# Allegro board disceep.brd
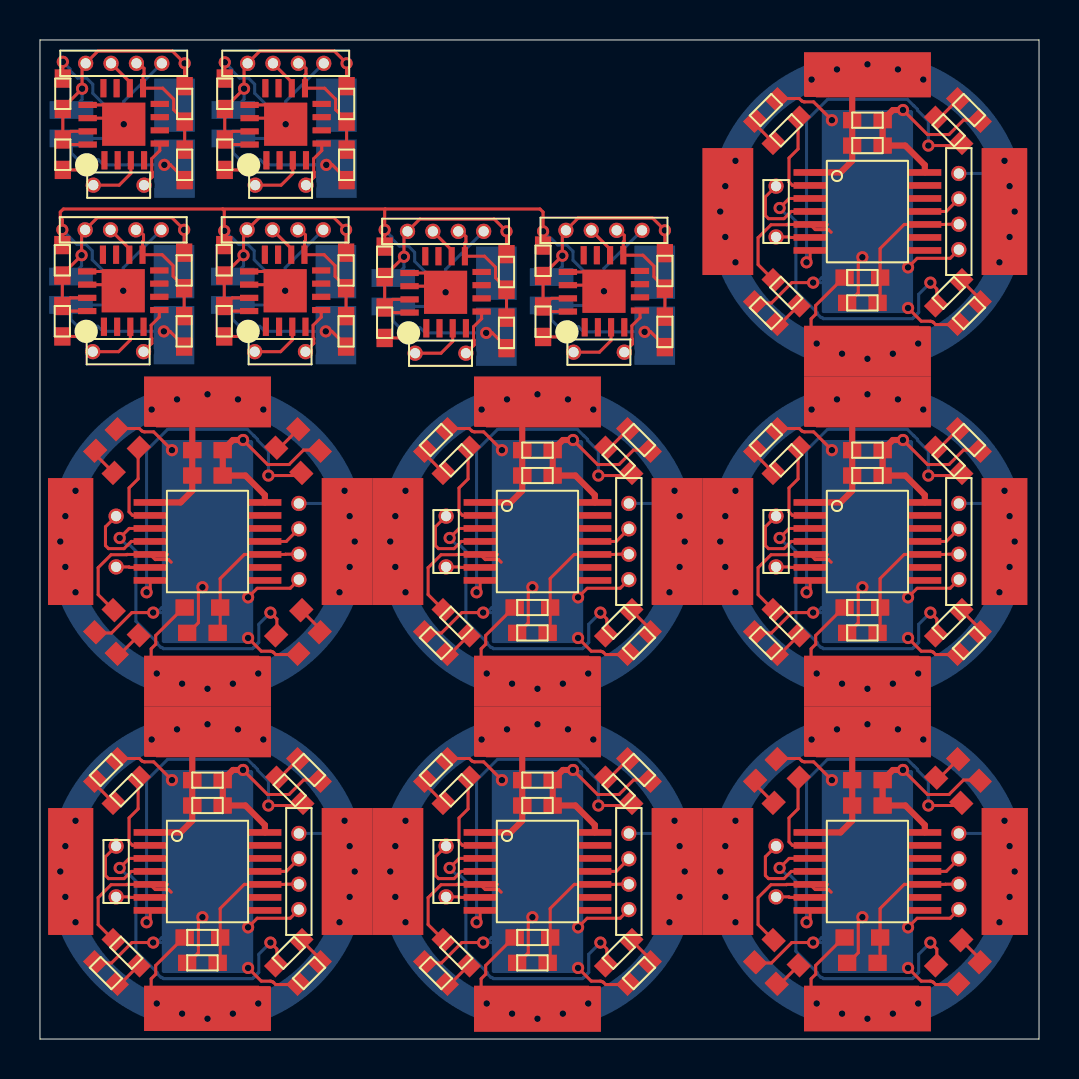
[diagram p0: board, top side]
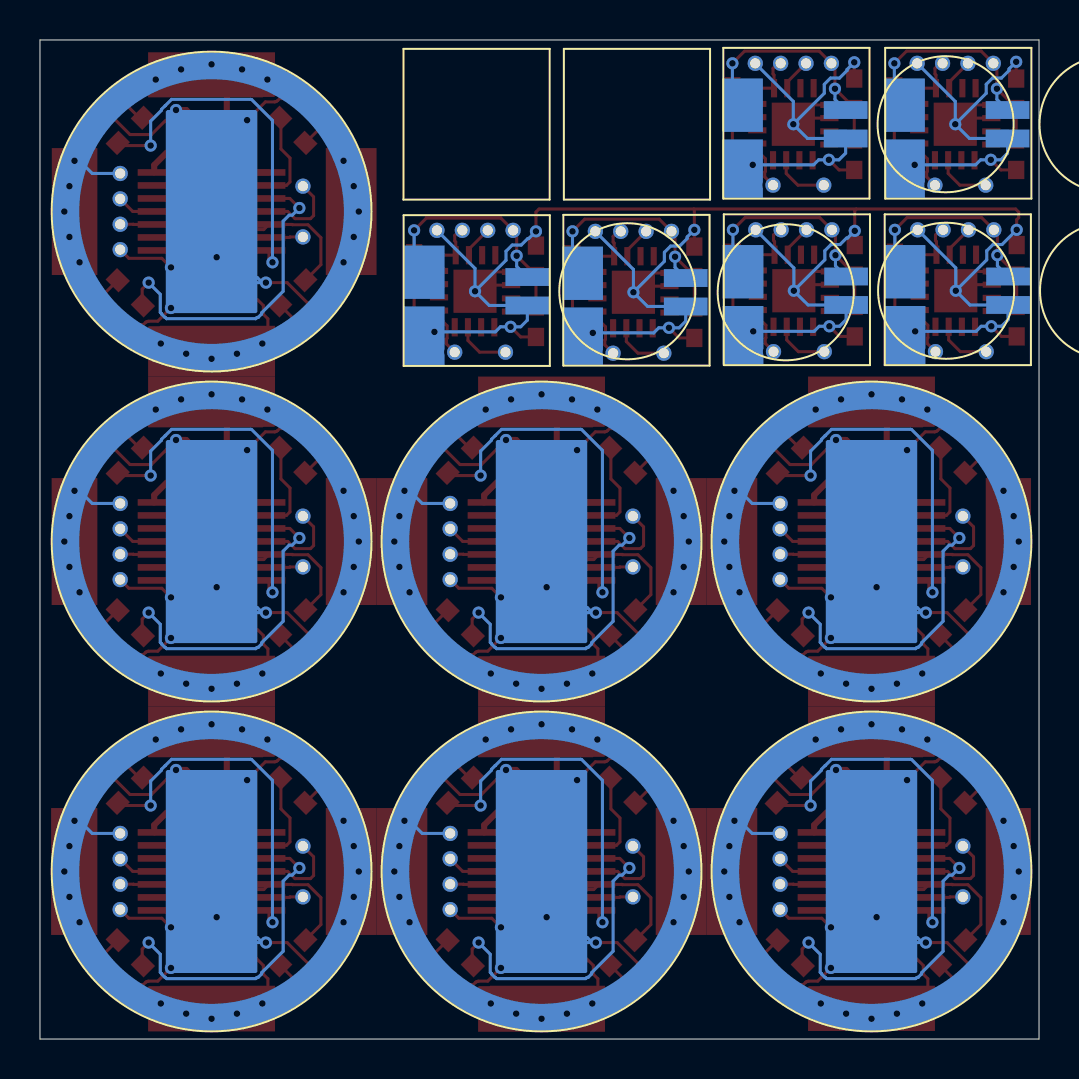
[diagram p1: board, bottom side, seen from below]

Outline 49.99 x 49.99 mm; copper layers: TOP, BOTTOM. Coordinates in mm from the lower left corner of the outline.
Outline path: 0,49.99 0,0 49.99,0 49.99,49.99 0,49.99

## Placement (name value [footprint] x y rotation side)
C1  10uF  [SMD_0603_CAP]  8.38 12.95 180 top
C2  .22uF  [SMD_0603_CAP]  8.38 11.68 180 top
C7  10uF  [SMD_0603_CAP]  1.12 38.96 270 top
C8  .22uF  [SMD_0603_CAP]  1.12 35.92 90 top
C10  100nf  [SMD_0603_CAP]  8.13 3.81 0 top
C11  10uF  [SMD_0603_CAP]  8.38 29.46 180 top
C12  .22uF  [SMD_0603_CAP]  41.4 11.68 180 top
C13  100nf  [SMD_0603_CAP]  8.13 20.32 0 top
C14  10uF  [SMD_0603_CAP]  24.89 12.95 180 top
C15  .22uF  [SMD_0603_CAP]  24.89 11.68 180 top
C16  100nf  [SMD_0603_CAP]  24.64 3.81 0 top
C17  100nf  [SMD_0603_CAP]  41.15 3.81 0 top
C18  10uF  [SMD_0603_CAP]  41.4 12.95 180 top
C19  .22uF  [SMD_0603_CAP]  8.38 28.19 180 top
C20  100nf  [SMD_0603_CAP]  7.21 35.41 90 top
C21  .25F  [SUPERCAP_VL3_2]  12.67 37.36 0 bottom
C22  100nf  [SMD_0603_CAP]  24.64 20.32 0 top
C23  10uF  [SMD_0603_CAP]  41.4 45.97 180 top
C24  .22uF  [SMD_0603_CAP]  41.4 44.7 180 top
C25  100nf  [SMD_0603_CAP]  41.15 20.32 0 top
C26  10uF  [SMD_0603_CAP]  24.89 29.46 180 top
C27  .22uF  [SMD_0603_CAP]  24.89 28.19 180 top
C28  100nf  [SMD_0603_CAP]  41.15 36.83 0 top
C29  10uF  [SMD_0603_CAP]  41.4 29.46 180 top
C30  .22uF  [SMD_0603_CAP]  41.4 28.19 180 top
C31  100nf  [SMD_0603_CAP]  15.34 43.74 90 top
C32  .25F  [SUPERCAP_VL3_2]  20.6 37.41 0 bottom
C33  10uF  [SMD_0603_CAP]  1.14 47.29 270 top
C34  .22uF  [SMD_0603_CAP]  9.25 44.25 90 top
C35  100nf  [SMD_0603_CAP]  7.24 43.74 90 top
C36  .25F  [SUPERCAP_VL3_2]  -3.43 45.77 0 bottom
C37  10uF  [SMD_0603_CAP]  17.25 38.89 270 top
C38  .22uF  [SMD_0603_CAP]  1.14 44.25 90 top
C39  100nf  [SMD_0603_CAP]  31.27 35.38 90 top
C40  .25F  [SUPERCAP_VL3_2]  4.67 45.77 0 bottom
C41  10uF  [SMD_0603_CAP]  25.17 38.94 270 top
C42  .22uF  [SMD_0603_CAP]  25.17 35.89 90 top
C43  100nf  [SMD_0603_CAP]  23.34 35.33 90 top
C44  .25F  [SUPERCAP_VL3_2]  -3.45 37.44 0 bottom
C45  10uF  [SMD_0603_CAP]  9.25 47.29 270 top
C46  .22uF  [SMD_0603_CAP]  17.25 35.84 90 top
C47  100nf  [SMD_0603_CAP]  15.32 35.41 90 top
C48  .25F  [SUPERCAP_VL3_2]  4.65 37.44 0 bottom
C49  10uF  [SMD_0603_CAP]  9.22 38.96 270 top
C50  .22uF  [SMD_0603_CAP]  9.22 35.92 90 top
D1  LED  [SMD_0603_LED]  3.3 13.46 225 top
D2  LED  [SMD_0603_LED]  13.46 3.3 45 top
D3  LED  [SMD_0603_LED]  3.3 3.3 315 top
D4  LED  [SMD_0603_LED]  13.46 13.46 135 top
D5  LED  [SMD_0603_LED]  3.3 29.97 225 top
D6  LED  [SMD_0603_LED]  13.46 19.81 45 top
D7  LED  [SMD_0603_LED]  3.3 19.81 315 top
D8  LED  [SMD_0603_LED]  13.46 29.97 135 top
D9  LED  [SMD_0603_LED]  19.81 13.46 225 top
D10  LED  [SMD_0603_LED]  29.97 3.3 45 top
D11  LED  [SMD_0603_LED]  19.81 3.3 315 top
D12  LED  [SMD_0603_LED]  29.97 13.46 135 top
D13  LED  [SMD_0603_LED]  36.32 13.46 225 top
D14  LED  [SMD_0603_LED]  46.48 3.3 45 top
D15  LED  [SMD_0603_LED]  36.32 3.3 315 top
D16  LED  [SMD_0603_LED]  46.48 13.46 135 top
D17  LED  [SMD_0603_LED]  36.32 46.48 225 top
D18  LED  [SMD_0603_LED]  46.48 36.32 45 top
D19  LED  [SMD_0603_LED]  36.32 36.32 315 top
D20  LED  [SMD_0603_LED]  46.48 46.48 135 top
D21  LED  [SMD_0603_LED]  19.81 29.97 225 top
D22  LED  [SMD_0603_LED]  29.97 19.81 45 top
D23  LED  [SMD_0603_LED]  19.81 19.81 315 top
D24  LED  [SMD_0603_LED]  29.97 29.97 135 top
D25  LED  [SMD_0603_LED]  36.32 29.97 225 top
D26  LED  [SMD_0603_LED]  46.48 19.81 45 top
D27  LED  [SMD_0603_LED]  36.32 19.81 315 top
D28  LED  [SMD_0603_LED]  46.48 29.97 135 top
J1  4 HEADER  [HEADER4_050]  12.95 8.38 180 top
J3  4 HEADER  [HEADER4_050]  4.17 40.49 270 top
J4  4 HEADER  [HEADER4_050]  12.95 24.89 180 top
J5  4 HEADER  [HEADER4_050]  29.46 8.38 180 top
J6  4 HEADER  [HEADER4_050]  45.97 8.38 180 top
J7  4 HEADER  [HEADER4_050]  45.97 41.4 180 top
J8  4 HEADER  [HEADER4_050]  29.46 24.89 180 top
J9  4 HEADER  [HEADER4_050]  45.97 24.89 180 top
J10  4 HEADER  [HEADER4_050]  12.29 48.82 270 top
J11  4 HEADER  [HEADER4_050]  4.19 48.82 270 top
J12  4 HEADER  [HEADER4_050]  28.22 40.46 270 top
J13  4 HEADER  [HEADER4_050]  20.29 40.41 270 top
J14  4 HEADER  [HEADER4_050]  12.27 40.49 270 top
R1  200  [SMD_0603_RES]  4.32 12.45 45 top
R2  200  [SMD_0603_RES]  12.45 4.32 225 top
R3  200  [SMD_0603_RES]  4.32 4.32 135 top
R4  200  [SMD_0603_RES]  12.5 12.45 315 top
R5  20k  [SMD_0603_RES]  8.13 5.08 180 top
R6  200  [SMD_0603_RES]  4.32 28.96 45 top
R7  200  [SMD_0603_RES]  12.45 20.83 225 top
R8  200  [SMD_0603_RES]  4.32 20.83 135 top
R9  200  [SMD_0603_RES]  12.45 28.96 315 top
R10  20k  [SMD_0603_RES]  8.13 21.59 180 top
R11  200  [SMD_0603_RES]  20.83 12.45 45 top
R12  200  [SMD_0603_RES]  28.96 4.32 225 top
R13  200  [SMD_0603_RES]  20.83 4.32 135 top
R14  200  [SMD_0603_RES]  28.96 12.45 315 top
R15  20k  [SMD_0603_RES]  24.64 5.08 180 top
R16  200  [SMD_0603_RES]  45.47 12.45 315 top
R17  20k  [SMD_0603_RES]  41.15 5.08 180 top
R18  200  [SMD_0603_RES]  37.34 12.45 45 top
R19  200  [SMD_0603_RES]  45.47 4.32 225 top
R20  200  [SMD_0603_RES]  37.34 4.32 135 top
R21  20k  [SMD_0603_RES]  7.21 38.46 90 top
R22  200  [SMD_0603_RES]  45.47 45.47 315 top
R23  20k  [SMD_0603_RES]  41.15 21.59 180 top
R24  200  [SMD_0603_RES]  37.34 45.47 45 top
R25  200  [SMD_0603_RES]  45.47 37.34 225 top
R26  200  [SMD_0603_RES]  37.34 37.34 135 top
R27  200  [SMD_0603_RES]  28.96 28.96 315 top
R28  20k  [SMD_0603_RES]  41.15 38.1 180 top
R29  200  [SMD_0603_RES]  20.83 28.96 45 top
R30  200  [SMD_0603_RES]  28.96 20.83 225 top
R31  200  [SMD_0603_RES]  20.83 20.83 135 top
R32  200  [SMD_0603_RES]  45.47 28.96 315 top
R33  20k  [SMD_0603_RES]  24.64 21.59 180 top
R34  200  [SMD_0603_RES]  37.34 28.96 45 top
R35  200  [SMD_0603_RES]  45.47 20.83 225 top
R36  200  [SMD_0603_RES]  37.34 20.83 135 top
R37  20k  [SMD_0603_RES]  15.34 46.79 90 top
R38  20k  [SMD_0603_RES]  7.24 46.79 90 top
R39  20k  [SMD_0603_RES]  31.27 38.43 90 top
R40  20k  [SMD_0603_RES]  23.34 38.38 90 top
R41  20k  [SMD_0603_RES]  15.32 38.46 90 top
U1  MSP430G2302PW14  [TSSOP14]  8.38 8.38 0 top
U3  MSP430G3202QFP  [QFN16]  4.17 37.44 90 top
U4  MSP430G2302PW14  [TSSOP14]  8.38 24.89 0 top
U5  MSP430G2302PW14  [TSSOP14]  24.89 8.38 0 top
U6  MSP430G2302PW14  [TSSOP14]  41.4 8.38 0 top
U7  MSP430G2302PW14  [TSSOP14]  41.4 41.4 0 top
U8  MSP430G2302PW14  [TSSOP14]  24.89 24.89 0 top
U9  MSP430G2302PW14  [TSSOP14]  41.4 24.89 0 top
U10  MSP430G3202QFP  [QFN16]  12.29 45.77 90 top
U11  MSP430G3202QFP  [QFN16]  4.19 45.77 90 top
U12  MSP430G3202QFP  [QFN16]  28.22 37.41 90 top
U13  MSP430G3202QFP  [QFN16]  20.29 37.36 90 top
U14  MSP430G3202QFP  [QFN16]  12.27 37.44 90 top
Y1  CRYSTAL  [PIEZO_HOLES]  3.81 8.38 180 top
Y3  CRYSTAL  [PIEZO_HOLES]  3.91 34.39 270 top
Y4  CRYSTAL  [PIEZO_HOLES]  3.81 24.89 180 top
Y5  CRYSTAL  [PIEZO_HOLES]  20.32 8.38 180 top
Y6  CRYSTAL  [PIEZO_HOLES]  36.83 8.38 180 top
Y7  CRYSTAL  [PIEZO_HOLES]  36.83 41.4 180 top
Y8  CRYSTAL  [PIEZO_HOLES]  20.32 24.89 180 top
Y9  CRYSTAL  [PIEZO_HOLES]  36.83 24.89 180 top
Y10  CRYSTAL  [PIEZO_HOLES]  12.04 42.72 270 top
Y11  CRYSTAL  [PIEZO_HOLES]  3.94 42.72 270 top
Y12  CRYSTAL  [PIEZO_HOLES]  27.97 34.37 270 top
Y13  CRYSTAL  [PIEZO_HOLES]  20.04 34.32 270 top
Y14  CRYSTAL  [PIEZO_HOLES]  12.01 34.39 270 top

## Library data of the parts
C1 C2 C7 C8 C10-C50 = C
D1-D28 = LED
J1 J3-J14 = 4 HEADER
R1-R41 = R
U1 U5 U7-U9 = MSP430G2302PW14: Tolerance: ***; User Part Number: ***
U3 U10-U14 = MSP430G3202QFP
U4 U6 = MSP430G2302PW14
Y1 Y3-Y14 = CRYSTAL

## Footprints (pads in the part's own frame, mm; a bottom-side part is the same pattern mirrored in y, then rotated)
HEADER4_050
  round 0.762 hole 0.508: 1(0,1.905) 2(0,0.635) 3(0,-0.635) 4(0,-1.905)
PIEZO_HOLES
  round 0.762 hole 0.508: 1(0,1.27) 2(0,-1.27)
QFN16
  rect 2.159x2.159 smd: (0,0)
  rect 0.914x0.305 smd: 1(-1.803,0.965) 2(-1.803,0.305) 3(-1.803,-0.356) 4(-1.803,-1.016) 9(1.803,-0.965) 10(1.803,-0.305) 11(1.803,0.356) 12(1.803,1.016)
  rect 0.305x0.914 smd: 5(-0.965,-1.803) 6(-0.305,-1.803) 7(0.356,-1.803) 8(1.016,-1.803) 13(0.965,1.803) 14(0.305,1.803) 15(-0.356,1.803) 16(-1.016,1.803)
SMD_0603_CAP
  rect 0.914x0.813 smd: 1(-0.762,0) 2(0.762,0)
SMD_0603_LED
  rect 0.914x0.813 smd: 1(-0.762,0) 2(0.762,0)
SMD_0603_RES
  rect 0.914x0.813 smd: 1(-0.889,0) 2(0.889,0)
SUPERCAP_VL3_2
  rect 2.184x0.889 smd: 1(5.004,-0.711) 2(5.004,0.711)
TSSOP14
  rect 1.651x0.33 smd: 1(-2.87,1.956) 2(-2.87,1.306) 3(-2.87,0.655) 4(-2.87,0.005) 5(-2.87,-0.645) 6(-2.87,-1.295) 7(-2.87,-1.946) 8(2.87,-1.946) 9(2.87,-1.295) 10(2.87,-0.645) 11(2.87,0.005) 12(2.87,0.655) 13(2.87,1.306) 14(2.87,1.956)

## Nets
VCC_BAT: C1.2 C2.2 C7.2 C8.2 C11.2 C12.2 C14.2 C15.2 C18.2 C19.2 C21.1 C23.2 C24.2 C26.2 C27.2 C29.2 C30.2 C32.1 C33.2 C34.2 C36.1 C37.2 C38.2 C40.1 C41.2 C42.2 C44.1 C45.2 C46.2 C48.1 C49.2 C50.2 J1.4 J3.4 J4.4 J5.4 J6.4 J7.4 J8.4 J9.4 J10.4 J11.4 J12.4 J13.4 J14.4 R5.2 R10.2 R15.2 R17.2 R21.2 R23.2 R28.2 R33.2 R37.2 R38.2 R39.2 R40.2 R41.2 U1.1(DVCC) U3.15(AVCC) U3.16(DVCC) U4.1(DVCC) U5.1(DVCC) U6.1(DVCC) U7.1(DVCC) U8.1(DVCC) U9.1(DVCC) U10.15(AVCC) U10.16(DVCC) U11.15(AVCC) U11.16(DVCC) U12.15(AVCC) U12.16(DVCC) U13.15(AVCC) U13.16(DVCC) U14.15(AVCC) U14.16(DVCC)
0: C1.1 C2.1 C7.1 C8.1 C10.1 C11.1 C12.1 C13.1 C14.1 C15.1 C16.1 C17.1 C18.1 C19.1 C20.1 C21.2 C22.1 C23.1 C24.1 C25.1 C26.1 C27.1 C28.1 C29.1 C30.1 C31.1 C32.2 C33.1 C34.1 C35.1 C36.2 C37.1 C38.1 C39.1 C40.2 C41.1 C42.1 C43.1 C44.2 C45.1 C46.1 C47.1 C48.2 C49.1 C50.1 D1.1(CATHODE) D2.1(CATHODE) D3.1(CATHODE) D4.1(CATHODE) D5.1(CATHODE) D6.1(CATHODE) D7.1(CATHODE) D8.1(CATHODE) D9.1(CATHODE) D10.1(CATHODE) D11.1(CATHODE) D12.1(CATHODE) D13.1(CATHODE) D14.1(CATHODE) D15.1(CATHODE) D16.1(CATHODE) D17.1(CATHODE) D18.1(CATHODE) D19.1(CATHODE) D20.1(CATHODE) D21.1(CATHODE) D22.1(CATHODE) D23.1(CATHODE) D24.1(CATHODE) D25.1(CATHODE) D26.1(CATHODE) D27.1(CATHODE) D28.1(CATHODE) J1.1 J3.1 J4.1 J5.1 J6.1 J7.1 J8.1 J9.1 J10.1 J11.1 J12.1 J13.1 J14.1 U1.14(DVSS) U3.13(AVSS) U3.14(DVSS) U4.14(DVSS) U5.14(DVSS) U6.14(DVSS) U7.14(DVSS) U8.14(DVSS) U9.14(DVSS) U10.13(AVSS) U10.14(DVSS) U11.13(AVSS) U11.14(DVSS) U12.13(AVSS) U12.14(DVSS) U13.13(AVSS) U13.14(DVSS) U14.13(AVSS) U14.14(DVSS)
_RST_: C10.2 C13.2 C16.2 C17.2 C22.2 C25.2 C28.2 J1.2 J4.2 J5.2 J6.2 J7.2 J8.2 J9.2 R5.1 R10.1 R15.1 R17.1 R23.1 R28.1 R33.1 U1.10(SBWIO) U4.10(SBWIO) U5.10(SBWIO) U6.10(SBWIO) U7.10(SBWIO) U8.10(SBWIO) U9.10(SBWIO)
TEST: J1.3 J4.3 J5.3 J6.3 J7.3 J8.3 J9.3 U1.11(SBWTCK) U4.11(SBWTCK) U5.11(SBWTCK) U6.11(SBWTCK) U7.11(SBWTCK) U8.11(SBWTCK) U9.11(SBWTCK)
N18508: U1.4(P1.2) Y1.2
N18520: U1.6(P1.4) Y1.1
N19094: R1.2 U1.2(P1.0)
N19101: R2.2 U1.3(P1.1)
N19113: R3.2 U1.5(P1.3)
N19315: R4.2 U1.7(P1.5)
N21863: U3.3(P1.2) Y3.2
N21867: U3.5(P1.4) Y3.1
N22415: C20.2 J3.2 R21.1 U3.9(SBWTDIO)
N22427: J3.3 U3.10(SBWTCK)
N25481: U4.4(P1.2) Y4.2
N25533: U4.6(P1.4) Y4.1
N25773: R6.2 U4.2(P1.0)
N25781: R7.2 U4.3(P1.1)
N25793: R8.2 U4.5(P1.3)
N25909: R9.2 U4.7(P1.5)
N29743: U5.4(P1.2) Y5.2
N29795: U5.6(P1.4) Y5.1
N30027: R11.2 U5.2(P1.0)
N30035: R12.2 U5.3(P1.1)
N30047: R13.2 U5.5(P1.3)
N30163: R14.2 U5.7(P1.5)
N31067: R16.2 U6.7(P1.5)
N31167: U6.4(P1.2) Y6.2
N31235: U6.6(P1.4) Y6.1
N31459: R18.2 U6.2(P1.0)
N31483: R19.2 U6.3(P1.1)
N31495: R20.2 U6.5(P1.3)
N35854: R22.2 U7.7(P1.5)
N35954: U7.4(P1.2) Y7.2
N36022: U7.6(P1.4) Y7.1
N36246: R24.2 U7.2(P1.0)
N36270: R25.2 U7.3(P1.1)
N36282: R26.2 U7.5(P1.3)
N37203: R27.2 U8.7(P1.5)
N37303: U8.4(P1.2) Y8.2
N37371: U8.6(P1.4) Y8.1
N37595: R29.2 U8.2(P1.0)
N37619: R30.2 U8.3(P1.1)
N37631: R31.2 U8.5(P1.3)
N38550: R32.2 U9.7(P1.5)
N38650: U9.4(P1.2) Y9.2
N38718: U9.6(P1.4) Y9.1
N38942: R34.2 U9.2(P1.0)
N38966: R35.2 U9.3(P1.1)
N38978: R36.2 U9.5(P1.3)
N41247: U10.3(P1.2) Y10.2
N41251: U10.5(P1.4) Y10.1
N41409: C31.2 J10.2 R37.1 U10.9(SBWTDIO)
N41421: J10.3 U10.10(SBWTCK)
N42285: U11.3(P1.2) Y11.2
N42289: U11.5(P1.4) Y11.1
N42447: C35.2 J11.2 R38.1 U11.9(SBWTDIO)
N42459: J11.3 U11.10(SBWTCK)
N43363: U12.3(P1.2) Y12.2
N43367: U12.5(P1.4) Y12.1
N43525: C39.2 J12.2 R39.1 U12.9(SBWTDIO)
N43537: J12.3 U12.10(SBWTCK)
N44477: U13.3(P1.2) Y13.2
N44481: U13.5(P1.4) Y13.1
N44639: C43.2 J13.2 R40.1 U13.9(SBWTDIO)
N44651: J13.3 U13.10(SBWTCK)
N45641: U14.3(P1.2) Y14.2
N45645: U14.5(P1.4) Y14.1
N45803: C47.2 J14.2 R41.1 U14.9(SBWTDIO)
N45815: J14.3 U14.10(SBWTCK)
N188740: D1.2(ANODE) R1.1
N188900: D2.2(ANODE) R2.1
N189060: D3.2(ANODE) R3.1
N192720: D4.2(ANODE) R4.1
N256650: D5.2(ANODE) R6.1
N256810: D6.2(ANODE) R7.1
N256970: D7.2(ANODE) R8.1
N258810: D8.2(ANODE) R9.1
N299270: D9.2(ANODE) R11.1
N299430: D10.2(ANODE) R12.1
N299590: D11.2(ANODE) R13.1
N301350: D12.2(ANODE) R14.1
N310551: D16.2(ANODE) R16.1
N313670: D13.2(ANODE) R18.1
N313830: D14.2(ANODE) R19.1
N314070: D15.2(ANODE) R20.1
N358421: D20.2(ANODE) R22.1
N361540: D17.2(ANODE) R24.1
N361700: D18.2(ANODE) R25.1
N361940: D19.2(ANODE) R26.1
N371911: D24.2(ANODE) R27.1
N375030: D21.2(ANODE) R29.1
N375190: D22.2(ANODE) R30.1
N375430: D23.2(ANODE) R31.1
N385381: D28.2(ANODE) R32.1
N388500: D25.2(ANODE) R34.1
N388660: D26.2(ANODE) R35.1
N388900: D27.2(ANODE) R36.1

Pads without a net: U1 8 9 12 13; U3 1 2 4 6 7 8 11 12; U4 8 9 12 13; U5 8 9 12 13; U6 8 9 12 13; U7 8 9 12 13; U8 8 9 12 13; U9 8 9 12 13; U10 1 2 4 6 7 8 11 12; U11 1 2 4 6 7 8 11 12; U12 1 2 4 6 7 8 11 12; U13 1 2 4 6 7 8 11 12; U14 1 2 4 6 7 8 11 12

## Via types
v1: diameter 0.61, hole 0.33, TOP to BOTTOM, 246 vias

## Routing (per net, layer and track width the routed paths; a pad name or vN(x,y) marks a point on that pad's centre or on a via; arc(x,y) is an arc through that point)
VCC_BAT: length 193.1
  TOP w0.152: 6.32,2.26 5.88,2.26 5.56,2.57 5.56,3.01 5.79,3.24 5.79,3.68 7.19,5.08 R5.2 ; U13.16 17.5,36.35 C46.2 ; 22.83,18.77 22.39,18.77 22.07,19.08 22.07,19.52 22.3,19.75 22.3,20.19 23.7,21.59 23.75,21.59 ; C42.2 25.58,37.06 U12.15 ; C42.2 25.43,36.4 U12.16 ; C42.2 C41.2 25.17,38.23 v1(26.14,39.19) 26.14,40.28 J12.4 26.92,41.07 30.66,41.07 v1(31.27,40.46) R39.2 ; C50.2 C49.2 9.22,38.25 v1(10.19,39.22) 10.19,40.31 J14.4 10.97,41.1 14.71,41.1 v1(15.32,40.49) R41.2 ; C50.2 9.47,36.42 U14.16 ; C50.2 9.63,37.08 U14.15 ; U11.15 1.55,45.42 C38.2 ; U3.16 1.37,36.42 C8.2 ; R40.2 v1(23.34,40.41) 22.73,41.02 19,41.02 J13.4 18.21,40.23 v1(18.21,39.14) 17.25,38.18 C37.2 C46.2 ; 23.75,5.08 23.7,5.08 22.3,3.68 22.3,3.24 22.07,3.01 22.07,2.57 22.39,2.26 22.83,2.26 ; U11.16 1.4,44.75 C38.2 ; C34.2 9.65,45.42 U10.15 ; C34.2 C45.2 9.25,46.58 v1(10.21,47.55) 10.21,48.64 J10.4 11,49.43 14.73,49.43 v1(15.34,48.82) R37.2 ; C34.2 9.5,44.75 U10.16 ; R28.2 40.21,38.1 38.81,36.7 38.81,36.26 38.58,36.03 38.58,35.59 38.9,35.28 39.34,35.28 ; R23.2 40.21,21.59 38.81,20.19 38.81,19.75 38.58,19.52 38.58,19.08 38.9,18.77 39.34,18.77 ; R10.2 7.19,21.59 5.79,20.19 5.79,19.75 5.56,19.52 5.56,19.08 5.88,18.77 6.32,18.77 ; C38.2 C33.2 1.14,46.58 v1(2.11,47.55) 2.11,48.64 J11.4 2.9,49.43 6.63,49.43 v1(7.24,48.82) R38.2 ; C8.2 C7.2 1.12,38.25 v1(2.08,39.22) 2.08,40.31 J3.4 2.87,41.1 6.6,41.1 v1(7.21,40.49) R21.2 ; C8.2 1.52,37.08 U3.15 ; U13.15 17.65,37.01 C46.2 ; R17.2 40.21,5.08 38.81,3.68 38.81,3.24 38.58,3.01 38.58,2.57 38.9,2.26 39.34,2.26
  TOP w0.305: U4.1 7.04,26.85 7.62,27.43 C19.2 C11.2 7.62,31.24 v1(6.86,32) ; v1(6.86,15.49) 7.62,14.73 C1.2 C2.2 7.62,10.92 7.04,10.34 U1.1 ; v1(39.88,15.49) 40.64,14.73 C18.2 C12.2 40.64,10.92 40.06,10.34 U6.1 ; v1(23.37,32) 24.13,31.24 C26.2 C27.2 24.13,27.43 23.55,26.85 U8.1 ; U7.1 40.06,43.36 40.64,43.94 C24.2 C23.2 40.64,47.75 v1(39.88,48.51) ; U5.1 23.55,10.34 24.13,10.92 C15.2 C14.2 24.13,14.73 v1(23.37,15.49) ; v1(39.88,32) 40.64,31.24 C29.2 C30.2 40.64,27.43 40.06,26.85 U9.1
  BOTTOM w0.152: v1(7.21,40.49) R21.2 7.09,39.22 ; 14.99,10.92 14.35,10.29 12.95,10.29 ; 48.01,27.43 47.37,26.8 J9.4 ; 31.5,10.92 30.86,10.29 29.46,10.29 ; 7.11,47.55 R38.2 v1(7.24,48.82) ; v1(2.08,39.22) 2.08,38.68 C44.1 ; J4.4 14.35,26.8 14.99,27.43 ; C36.1 2.11,47.02 v1(2.11,47.55) ; 48.01,43.94 47.37,43.31 J7.4 ; v1(31.27,40.46) R39.2 31.14,39.19 ; 15.19,39.22 R41.2 v1(15.32,40.49) ; 45.97,10.29 47.37,10.29 48.01,10.92 ; C40.1 10.21,47.02 v1(10.21,47.55) ; J8.4 30.86,26.8 31.5,27.43 ; v1(15.34,48.82) R37.2 15.21,47.55 ; v1(23.34,40.41) R40.2 23.22,39.14 ; v1(10.19,39.22) 10.19,38.68 C48.1 ; C32.1 26.14,38.66 v1(26.14,39.19) ; v1(18.21,39.14) 18.21,38.61 C21.1
  vias: v1(1.02,24.89) v1(1.02,8.38) v1(1.27,26.16) v1(1.27,23.62) v1(1.27,9.65) v1(1.27,7.11) v1(1.78,27.43) v1(1.78,22.35) v1(1.78,10.92) v1(1.78,5.84) v1(5.59,31.5) v1(5.59,14.99) v1(5.84,18.29) v1(5.84,1.78) v1(7.11,17.78) v1(7.11,1.27) v1(8.38,32.26) v1(8.38,17.53) v1(8.38,15.75) v1(8.38,1.02) v1(9.65,17.78) v1(9.65,1.27) v1(9.91,32) v1(9.91,15.49) v1(10.92,18.29) v1(10.92,1.78) v1(11.18,31.5) v1(11.18,14.99) v1(14.99,22.35) v1(14.99,5.84) v1(15.24,27.43) v1(15.24,10.92) v1(15.49,26.16) v1(15.49,23.62) v1(15.49,9.65) v1(15.49,7.11) v1(15.75,24.89) v1(15.75,8.38) v1(17.53,24.89) v1(17.53,8.38) v1(17.78,26.16) v1(17.78,23.62) v1(17.78,9.65) v1(17.78,7.11) v1(18.29,27.43) v1(18.29,22.35) v1(18.29,10.92) v1(18.29,5.84) v1(22.1,31.5) v1(22.1,14.99) v1(22.35,18.29) v1(22.35,1.78) v1(23.62,17.78) v1(23.62,1.27) v1(24.89,32.26) v1(24.89,17.53) v1(24.89,15.75) v1(24.89,1.02) v1(26.16,17.78) v1(26.16,1.27) v1(26.42,32) v1(26.42,15.49) v1(27.43,18.29) v1(27.43,1.78) v1(27.69,31.5) v1(27.69,14.99) v1(31.5,22.35) v1(31.5,5.84) v1(31.75,27.43) v1(31.75,10.92) v1(32,26.16) v1(32,23.62) v1(32,9.65) v1(32,7.11) v1(32.26,24.89) v1(32.26,8.38) v1(34.04,41.4) v1(34.04,24.89) v1(34.04,8.38) v1(34.29,42.67) v1(34.29,40.13) v1(34.29,26.16) v1(34.29,23.62) v1(34.29,9.65) v1(34.29,7.11) v1(34.8,43.94) v1(34.8,38.86) v1(34.8,27.43) v1(34.8,22.35) v1(34.8,10.92) v1(34.8,5.84) v1(38.61,48.01) v1(38.61,31.5) v1(38.61,14.99) v1(38.86,34.8) v1(38.86,18.29) v1(38.86,1.78) v1(40.13,34.29) v1(40.13,17.78) v1(40.13,1.27) v1(41.4,48.77) v1(41.4,34.04) v1(41.4,32.26) v1(41.4,17.53) v1(41.4,15.75) v1(41.4,1.02) v1(42.67,34.29) v1(42.67,17.78) v1(42.67,1.27) v1(42.93,48.51) v1(42.93,32) v1(42.93,15.49) v1(43.94,34.8) v1(43.94,18.29) v1(43.94,1.78) v1(44.2,48.01) v1(44.2,31.5) v1(44.2,14.99) v1(48.01,38.86) v1(48.01,22.35) v1(48.01,5.84) v1(48.26,43.94) v1(48.26,27.43) v1(48.26,10.92) v1(48.51,42.67) v1(48.51,40.13) v1(48.51,26.16) v1(48.51,23.62) v1(48.51,9.65) v1(48.51,7.11) v1(48.77,41.4) v1(48.77,24.89) v1(48.77,8.38)
0: length 361.1
  TOP w0.152: D2.1 12.89,2.73 11.79,2.73 11.68,2.83 11.64,2.86 11.59,2.88 11.53,2.9 11.07,2.9 v1(10.41,3.56) ; v1(10.41,22.1) 10.87,22.55 12.52,22.55 J4.1 ; 12.22,37.74 11.56,38.4 U14.13 ; 12.22,37.74 U14.14 ; 12.22,37.74 12.27,37.69 v1(12.27,37.44) ; v1(10.16,13.46) 11.39,12.24 12.46,12.24 13.19,12.96 13.96,12.96 D4.1 ; 20.24,37.67 19.58,38.33 U13.13 ; 20.24,37.67 U13.14 ; 20.24,37.67 20.29,37.62 v1(20.29,37.36) ; 4.14,46.08 U11.14 ; 4.14,46.08 3.48,46.74 U11.13 ; 4.14,46.08 4.19,46.02 v1(4.19,45.77) ; J9.1 45.54,22.55 43.89,22.55 v1(43.43,22.1) ; 11.99,46.08 v1(12.29,45.77) ; 11.99,46.08 12.24,46.08 11.58,46.74 U10.13 ; 11.99,46.08 U10.14 ; v1(10.52,43.99) 10.01,43.48 C34.1 ; v1(39.62,45.97) 38.71,46.89 38.25,46.89 38.2,46.9 38.15,46.92 38.1,46.95 37.99,47.06 36.9,47.06 D17.1 ; v1(43.18,13.46) 44.41,12.24 45.48,12.24 46.21,12.96 46.98,12.96 D16.1 ; v1(41.15,39.12) 40.94,38.91 40.94,37.34 40.44,36.83 C28.1 ; 17.27,41.53 17.25,41.5 v1(17.25,40.49) C37.1 ; 17.27,41.53 9.14,41.53 ; 17.27,41.53 25.02,41.53 25.17,41.38 v1(25.17,40.41) C41.1 ; D11.1 19.31,3.8 20.09,3.8 21.11,4.83 v1(22.17,4.83) ; D28.1 46.98,29.47 46.21,29.47 45.48,28.75 44.41,28.75 v1(43.18,29.97) ; v1(8.13,22.61) 7.92,22.4 7.92,20.83 7.42,20.32 C13.1 ; D23.1 19.31,20.31 20.09,20.31 21.11,21.34 v1(22.17,21.34) ; C46.1 18.01,35.08 v1(18.52,35.59) ; D8.1 13.96,29.47 13.19,29.47 12.46,28.75 11.39,28.75 v1(10.16,29.97) ; J6.1 45.54,6.04 43.89,6.04 v1(43.43,5.59) ; v1(6.2,35.41) 6.5,35.41 7.21,34.7 C20.1 ; C25.1 40.44,20.32 40.94,20.83 40.94,22.4 v1(41.15,22.61) ; v1(6.6,12.95) 5.69,13.87 5.23,13.87 5.18,13.88 5.13,13.9 5.08,13.93 4.97,14.04 3.88,14.04 D1.1 ; J8.1 29.03,22.55 27.38,22.55 v1(26.92,22.1) ; U12.13 27.51,38.38 28.17,37.72 U12.14 ; v1(39.62,12.95) 38.71,13.87 38.25,13.87 38.2,13.88 38.15,13.9 38.1,13.93 37.99,14.04 36.9,14.04 D13.1 ; C17.1 40.44,3.81 40.94,4.32 40.94,5.89 v1(41.15,6.1) ; 9.14,41.53 9.22,41.45 v1(9.22,40.44) C49.1 ; 9.14,41.53 1.17,41.53 1.02,41.38 1.02,41.1 1.12,41 v1(1.12,40.49) C7.1 ; v1(10.49,35.66) 9.98,35.15 C50.1 ; C10.1 7.42,3.81 7.92,4.32 7.92,5.89 v1(8.13,6.1) ; 4.11,37.74 4.17,37.69 v1(4.17,37.44) ; 4.11,37.74 U3.14 ; 4.11,37.74 3.45,38.4 U3.13 ; v1(6.6,29.46) 5.69,30.38 5.23,30.38 5.18,30.39 5.13,30.41 5.08,30.44 4.97,30.55 3.88,30.55 D5.1 ; C33.1 v1(1.14,48.9) ; v1(10.41,5.59) 10.87,6.04 12.52,6.04 J1.1 ; v1(26.92,20.07) 27.58,19.41 28.04,19.41 28.1,19.39 28.15,19.37 28.19,19.34 28.3,19.24 29.4,19.24 D22.1 ; C47.1 15.32,34.7 14.61,35.41 v1(14.3,35.41) ; v1(38.68,4.83) 37.62,4.83 36.6,3.8 35.82,3.8 D15.1 ; v1(10.41,20.07) 11.07,19.41 11.53,19.41 11.59,19.39 11.64,19.37 11.68,19.34 11.79,19.24 12.89,19.24 D6.1 ; v1(6.22,43.74) 6.53,43.74 7.24,43.03 C35.1 ; v1(26.92,3.56) 27.58,2.9 28.04,2.9 28.1,2.88 28.15,2.86 28.19,2.83 28.3,2.73 29.4,2.73 D10.1 ; D25.1 36.9,30.55 37.99,30.55 38.1,30.44 38.15,30.41 38.2,30.39 38.25,30.38 38.71,30.38 v1(39.62,29.46) ; v1(23.11,29.46) 22.2,30.38 21.74,30.38 21.69,30.39 21.64,30.41 21.59,30.44 21.48,30.55 20.39,30.55 D21.1 ; C38.1 1.91,43.48 v1(2.41,43.99) ; C8.1 1.88,35.15 v1(2.39,35.66) ; D14.1 45.91,2.73 44.81,2.73 44.7,2.83 44.66,2.86 44.61,2.88 44.55,2.9 44.09,2.9 v1(43.43,3.56) ; v1(43.43,20.07) 44.09,19.41 44.55,19.41 44.61,19.39 44.66,19.37 44.7,19.34 44.81,19.24 45.91,19.24 D26.1 ; v1(22.33,35.33) 22.63,35.33 23.34,34.62 C43.1 ; D3.1 2.8,3.8 3.58,3.8 4.6,4.83 v1(5.66,4.83) ; C39.1 31.27,34.67 30.56,35.38 v1(30.25,35.38) ; C31.1 15.34,43.03 14.63,43.74 v1(14.33,43.74) ; v1(23.11,12.95) 22.2,13.87 21.74,13.87 21.69,13.88 21.64,13.9 21.59,13.93 21.48,14.04 20.39,14.04 D9.1 ; v1(43.43,36.58) 44.09,35.92 44.55,35.92 44.61,35.9 44.66,35.88 44.7,35.85 44.81,35.75 45.91,35.75 D18.1 ; v1(24.64,22.61) 24.43,22.4 24.43,20.83 23.93,20.32 C22.1 ; v1(24.64,6.1) 24.43,5.89 24.43,4.32 23.93,3.81 C16.1 ; v1(26.44,35.64) 25.93,35.13 C42.1 ; v1(43.18,46.48) 44.41,45.26 45.48,45.26 46.21,45.98 46.98,45.98 D20.1 ; C45.1 v1(9.25,48.87) ; D19.1 35.82,36.82 36.6,36.82 37.62,37.85 v1(38.68,37.85) ; D24.1 30.47,29.47 29.7,29.47 28.97,28.75 27.9,28.75 v1(26.67,29.97) ; v1(38.68,21.34) 37.62,21.34 36.6,20.31 35.82,20.31 D27.1 ; v1(5.66,21.34) 4.6,21.34 3.58,20.31 2.8,20.31 D7.1 ; J7.1 45.54,39.06 43.89,39.06 v1(43.43,38.61) ; v1(26.92,5.59) 27.38,6.04 29.03,6.04 J5.1 ; D12.1 30.47,12.96 29.7,12.96 28.97,12.24 27.9,12.24 v1(26.67,13.46)
  TOP w0.305: U9.14 44.27,27.22 43.29,28.19 C30.1 C29.1 42.67,29.97 v1(43.18,29.97) ; U4.14 11.25,27.22 10.27,28.19 C19.1 C11.1 9.65,29.97 v1(10.16,29.97) ; v1(10.16,13.46) 9.65,13.46 C1.1 C2.1 10.27,11.68 11.25,10.71 U1.14 ; U6.14 44.27,10.71 43.29,11.68 C12.1 C18.1 42.67,13.46 v1(43.18,13.46) ; v1(43.18,46.48) 42.67,46.48 C23.1 C24.1 43.29,44.7 44.27,43.73 U7.14 ; U8.14 27.76,27.22 26.78,28.19 C27.1 C26.1 26.16,29.97 v1(26.67,29.97) ; U5.14 27.76,10.71 26.78,11.68 C15.1 C14.1 26.16,13.46 v1(26.67,13.46)
  BOTTOM w0.152: v1(22.17,4.83) 22.35,4.83 ; 22.35,4.83 22.86,4.83 22.61,5.08 22.35,4.83 ; v1(22.17,21.34) 22.35,21.34 ; 22.35,21.34 22.61,21.59 22.86,21.34 22.35,21.34 ; v1(4.19,45.77) 3.48,45.06 C36.2 1.57,44.32 1.91,43.99 v1(2.41,43.99) 2.92,43.99 3.17,43.74 v1(6.22,43.74) ; v1(4.19,45.77) 2.64,47.32 2.64,47.77 2.33,48.08 1.88,48.08 1.5,48.46 1.5,48.54 v1(1.14,48.9) ; v1(4.19,45.77) 4.19,46.91 J11.1 ; 5.84,4.83 6.1,5.08 6.35,4.83 5.84,4.83 ; 5.84,4.83 v1(5.66,4.83) ; v1(30.25,35.38) 27.2,35.38 26.95,35.64 v1(26.44,35.64) 25.93,35.64 25.6,35.97 C32.2 27.51,36.7 v1(28.22,37.41) ; v1(12.27,37.44) 12.27,38.58 J14.1 ; v1(12.27,37.44) 10.72,38.99 10.72,39.44 10.41,39.75 9.96,39.75 9.63,40.08 9.58,40.08 v1(9.22,40.44) ; v1(12.27,37.44) 11.56,36.73 C48.2 9.65,35.99 9.98,35.66 v1(10.49,35.66) 11,35.66 11.25,35.41 v1(14.3,35.41) ; v1(6.2,35.41) 3.15,35.41 2.9,35.66 v1(2.39,35.66) 1.88,35.66 1.55,35.99 C44.2 3.45,36.73 v1(4.17,37.44) ; v1(5.66,21.34) 5.84,21.34 ; 5.84,21.34 6.1,21.59 6.35,21.34 5.84,21.34 ; v1(1.12,40.49) 1.85,39.75 2.3,39.75 2.62,39.44 2.62,38.99 v1(4.17,37.44) ; v1(25.17,40.41) 25.53,40.05 25.58,40.05 25.91,39.73 26.36,39.73 26.67,39.41 26.67,38.96 v1(28.22,37.41) ; v1(38.68,4.83) 38.86,4.83 ; 38.86,4.83 39.12,5.08 39.37,4.83 38.86,4.83 ; J10.1 12.29,46.91 v1(12.29,45.77) ; v1(17.25,40.49) 17.61,40.13 17.61,40.05 17.98,39.67 18.43,39.67 18.75,39.36 18.75,38.91 v1(20.29,37.36) ; J13.1 20.29,38.51 v1(20.29,37.36) ; v1(9.25,48.87) 9.61,48.51 9.61,48.46 9.98,48.08 10.43,48.08 10.74,47.77 10.74,47.32 v1(12.29,45.77) ; v1(12.29,45.77) 11.58,45.06 C40.2 9.68,44.32 10.01,43.99 v1(10.52,43.99) 11.02,43.99 11.28,43.74 v1(14.33,43.74) ; v1(28.22,37.41) 28.22,38.56 J12.1 ; v1(38.68,21.34) 38.86,21.34 ; 38.86,21.34 39.37,21.34 39.12,21.59 38.86,21.34 ; v1(38.68,37.85) 38.86,37.85 ; 38.86,37.85 39.12,38.1 39.37,37.85 38.86,37.85 ; v1(4.17,37.44) 4.17,38.58 J3.1 ; v1(22.33,35.33) 19.28,35.33 19.02,35.59 v1(18.52,35.59) 18.01,35.59 17.68,35.92 C21.2 19.58,36.65 v1(20.29,37.36)
_RST_: length 50.5
  TOP w0.152: J4.2 12.29,24.26 12.28,24.25 U4.10 10.22,24.25 9.02,23.04 R10.1 9.02,20.45 C13.2 ; C22.2 25.53,20.45 R33.1 25.53,23.04 26.73,24.25 U8.10 28.79,24.25 28.8,24.26 J8.2 ; C16.2 25.53,3.94 R15.1 25.53,6.53 26.73,7.74 U5.10 28.79,7.74 28.8,7.75 J5.2 ; C17.2 42.04,3.94 42.04,6.53 43.24,7.74 U6.10 45.3,7.74 45.31,7.75 J6.2 ; J1.2 12.29,7.75 12.28,7.74 U1.10 10.22,7.74 9.02,6.53 R5.1 9.02,3.94 C10.2 ; C25.2 42.04,20.45 42.04,23.04 43.24,24.25 U9.10 45.3,24.25 45.31,24.26 J9.2 ; J7.2 45.31,40.77 45.3,40.76 U7.10 43.24,40.76 42.04,39.55 42.04,36.96 C28.2
TEST: length 13.7
  TOP w0.152: U9.11 45.34,24.9 J9.3 ; J5.3 28.83,8.39 U5.11 ; J6.3 45.34,8.39 U6.11 ; J8.3 28.83,24.9 U8.11 ; J7.3 45.34,41.41 U7.11 ; U1.11 12.32,8.39 J1.3 ; U4.11 12.32,24.9 J4.3
N18508: length 4.1
  TOP w0.152: U1.4 4.57,8.39 4.21,8.03 3.43,8.03 3.28,8.18 3.28,9.12 Y1.2
N18520: length 1.7
  TOP w0.152: U1.6 4.48,7.09 4.46,7.11 Y1.1
N19094: length 4.5
  TOP w0.152: U1.2 4.64,9.69 4.46,9.87 4.46,11.06 4.91,11.51 4.91,13.04 R1.2
N19101: length 16.2
  TOP w0.152: U1.3 4.47,9.04 v1(3.99,8.56) ; v1(11.53,4.83) 11.85,4.5 11.85,3.73 R2.2
  BOTTOM w0.152: v1(3.99,8.56) 4.35,8.2 4.5,8.2 4.8,7.9 4.8,4.39 5.87,3.33 5.88,3.27 5.89,3.25 6.04,3.09 6.07,3.08 6.12,3.07 6.17,3.02 10.63,3.02 10.7,3.08 10.7,3.08 10.72,3.09 10.88,3.25 10.89,3.27 10.89,3.27 10.95,3.34 10.95,4.24 v1(11.53,4.83)
N19113: length 7.4
  TOP w0.152: R3.2 2.91,5.73 2.91,7.08 3.56,7.72 4.34,7.72 4.35,7.74 U1.5 ; U1.5 6.38,7.74 ; U1.5 5.77,7.48 6.43,7.48 6.57,7.35
N19315: length 17.7
  TOP w0.152: 13.07,11.82 13.04,11.85 12.87,11.68 v1(11.43,11.68) ; U1.7 5.51,6.02 v1(5.33,5.84)
  BOTTOM w0.152: v1(5.33,5.84) 5.33,12.91 5.34,12.95 6.38,13.99 6.42,14 10.38,14 10.7,13.68 10.7,13.68 10.88,13.5 10.89,13.49 10.9,13.44 11.43,12.91 v1(11.43,11.68)
N21863: length 2.8
  TOP w0.152: U3.3 4.52,34.98 3.94,34.39 Y3.2
N21867: length 2.4
  TOP w0.152: U3.5 5.97,36.12 5.56,35.71 5.56,35.08 5.59,35.05 5.59,34.8 Y3.1
N22415: length 6
  TOP w0.152: C20.2 R21.1 7.21,37.62 6.66,38.17 6.66,38.69 6.11,39.24 5.13,39.24 5.13,39.9 5.18,39.95 5.18,40.23 4.93,40.49 J3.2
N22427: length 1.6
  TOP w0.152: 4.47,39.24 4.47,39.55 J3.3
N25481: length 4.1
  TOP w0.152: U4.4 4.57,24.9 4.21,24.54 3.43,24.54 3.28,24.69 3.28,25.63 Y4.2
N25533: length 1.7
  TOP w0.152: U4.6 4.48,23.6 4.46,23.62 Y4.1
N25773: length 4.5
  TOP w0.152: U4.2 4.64,26.2 4.46,26.38 4.46,27.57 4.91,28.02 4.91,29.55 R6.2
N25781: length 16.2
  TOP w0.152: v1(11.53,21.34) 11.85,21.01 11.85,20.24 R7.2 ; U4.3 4.47,25.55 v1(3.99,25.07)
  BOTTOM w0.152: v1(11.53,21.34) 10.95,20.75 10.95,19.85 10.89,19.78 10.89,19.78 10.88,19.76 10.72,19.6 10.7,19.59 10.7,19.59 10.63,19.53 6.17,19.53 6.12,19.58 6.07,19.59 6.04,19.6 5.89,19.76 5.88,19.78 5.87,19.84 4.8,20.9 4.8,24.41 4.5,24.71 4.35,24.71 v1(3.99,25.07)
N25793: length 7.4
  TOP w0.152: U4.5 5.77,23.99 6.43,23.99 6.57,23.86 ; U4.5 6.38,24.25 ; U4.5 4.35,24.25 4.34,24.23 3.56,24.23 2.91,23.59 2.91,22.24 R8.2
N25909: length 17.7
  TOP w0.152: U4.7 5.51,22.53 v1(5.33,22.35) ; v1(11.43,28.19) 12.87,28.19 13.04,28.36 R9.2
  BOTTOM w0.152: v1(11.43,28.19) 11.43,29.42 10.9,29.95 10.89,30 10.88,30.01 10.7,30.19 10.7,30.19 10.38,30.51 6.42,30.51 6.38,30.5 5.34,29.46 5.33,29.42 v1(5.33,22.35)
N29743: length 4.1
  TOP w0.152: Y5.2 19.79,9.12 19.79,8.18 19.94,8.03 20.72,8.03 21.08,8.39 U5.4
N29795: length 1.7
  TOP w0.152: Y5.1 20.97,7.11 20.99,7.09 U5.6
N30027: length 4.5
  TOP w0.152: U5.2 21.15,9.69 20.97,9.87 20.97,11.06 21.42,11.51 21.42,13.04 R11.2
N30035: length 16.2
  TOP w0.152: U5.3 20.98,9.04 v1(20.5,8.56) ; v1(28.04,4.83) 28.36,4.5 28.36,3.73 R12.2
  BOTTOM w0.152: v1(28.04,4.83) 27.46,4.24 27.46,3.34 27.4,3.27 27.4,3.27 27.39,3.25 27.23,3.09 27.21,3.08 27.21,3.08 27.14,3.02 22.68,3.02 22.63,3.07 22.58,3.08 22.55,3.09 22.4,3.25 22.39,3.27 22.38,3.33 21.31,4.39 21.31,7.9 21.01,8.2 20.86,8.2 v1(20.5,8.56)
N30047: length 7.4
  TOP w0.152: 23.08,7.35 22.94,7.48 22.28,7.48 U5.5 ; U5.5 20.86,7.74 20.85,7.72 20.07,7.72 19.42,7.08 19.42,5.73 R13.2 ; U5.5 22.89,7.74
N30163: length 17.7
  TOP w0.152: v1(21.84,5.84) 22.02,6.02 U5.7 ; v1(27.94,11.68) 29.38,11.68 29.55,11.85 R14.2
  BOTTOM w0.152: v1(27.94,11.68) 27.94,12.91 27.41,13.44 27.4,13.49 27.39,13.5 27.21,13.68 27.21,13.68 26.89,14 22.93,14 22.89,13.99 21.85,12.95 21.84,12.91 v1(21.84,5.84)
N31067: length 17.7
  TOP w0.152: v1(44.45,11.68) 45.89,11.68 46.06,11.85 R16.2 ; U6.7 38.53,6.02 v1(38.35,5.84)
  BOTTOM w0.152: v1(44.45,11.68) 44.45,12.91 43.92,13.44 43.91,13.49 43.9,13.5 43.72,13.68 43.72,13.68 43.4,14 39.44,14 39.4,13.99 38.36,12.95 38.35,12.91 v1(38.35,5.84)
N31167: length 4.1
  TOP w0.152: Y6.2 36.3,9.12 36.3,8.18 36.45,8.03 37.23,8.03 37.59,8.39 U6.4
N31235: length 1.7
  TOP w0.152: Y6.1 37.48,7.11 37.5,7.09 U6.6
N31459: length 4.5
  TOP w0.152: U6.2 37.66,9.69 37.48,9.87 37.48,11.06 37.93,11.51 37.93,13.04 R18.2
N31483: length 16.2
  TOP w0.152: U6.3 37.49,9.04 v1(37.01,8.56) ; v1(44.55,4.83) 44.87,4.5 44.87,3.73 R19.2
  BOTTOM w0.152: v1(44.55,4.83) 43.97,4.24 43.97,3.34 43.91,3.27 43.91,3.27 43.9,3.25 43.74,3.09 43.72,3.08 43.72,3.08 43.65,3.02 39.19,3.02 39.14,3.07 39.09,3.08 39.06,3.09 38.91,3.25 38.9,3.27 38.89,3.33 37.82,4.39 37.82,7.9 37.52,8.2 37.37,8.2 v1(37.01,8.56)
N31495: length 7.4
  TOP w0.152: 39.59,7.35 39.45,7.48 38.79,7.48 U6.5 ; 39.4,7.74 U6.5 ; U6.5 37.37,7.74 37.36,7.72 36.58,7.72 35.93,7.08 35.93,5.73 R20.2
N35854: length 17.7
  TOP w0.152: U7.7 38.53,39.04 v1(38.35,38.86) ; v1(44.45,44.7) 45.89,44.7 46.06,44.87 R22.2
  BOTTOM w0.152: v1(44.45,44.7) 44.45,45.93 43.92,46.46 43.91,46.51 43.9,46.52 43.72,46.7 43.72,46.7 43.4,47.02 39.44,47.02 39.4,47.01 38.36,45.97 38.35,45.93 v1(38.35,38.86)
N35954: length 4.1
  TOP w0.152: Y7.2 36.3,42.14 36.3,41.2 36.45,41.05 37.23,41.05 37.59,41.41 U7.4
N36022: length 1.7
  TOP w0.152: Y7.1 37.48,40.13 37.5,40.11 U7.6
N36246: length 4.5
  TOP w0.152: U7.2 37.66,42.71 37.48,42.89 37.48,44.08 37.93,44.53 37.93,46.06 R24.2
N36270: length 16.2
  TOP w0.152: U7.3 37.49,42.06 v1(37.01,41.58) ; R25.2 44.87,36.75 44.87,37.52 v1(44.55,37.85)
  BOTTOM w0.152: v1(44.55,37.85) 43.97,37.26 43.97,36.36 43.91,36.29 43.91,36.29 43.9,36.27 43.74,36.11 43.72,36.1 43.72,36.1 43.65,36.04 39.19,36.04 39.14,36.09 39.09,36.1 39.06,36.11 38.91,36.27 38.9,36.29 38.89,36.35 37.82,37.41 37.82,40.92 37.52,41.22 37.37,41.22 v1(37.01,41.58)
N36282: length 7.4
  TOP w0.152: 39.59,40.37 39.45,40.5 38.79,40.5 U7.5 ; U7.5 37.37,40.76 37.36,40.74 36.58,40.74 35.93,40.1 35.93,38.75 R26.2 ; U7.5 39.4,40.76
N37203: length 17.7
  TOP w0.152: v1(27.94,28.19) 29.38,28.19 29.55,28.36 R27.2 ; U8.7 22.02,22.53 v1(21.84,22.35)
  BOTTOM w0.152: v1(21.84,22.35) 21.84,29.42 21.85,29.46 22.89,30.5 22.93,30.51 26.89,30.51 27.21,30.19 27.21,30.19 27.39,30.01 27.4,30 27.41,29.95 27.94,29.42 v1(27.94,28.19)
N37303: length 4.1
  TOP w0.152: U8.4 21.08,24.9 20.72,24.54 19.94,24.54 19.79,24.69 19.79,25.63 Y8.2
N37371: length 1.7
  TOP w0.152: U8.6 20.99,23.6 20.97,23.62 Y8.1
N37595: length 4.5
  TOP w0.152: U8.2 21.15,26.2 20.97,26.38 20.97,27.57 21.42,28.02 21.42,29.55 R29.2
N37619: length 16.2
  TOP w0.152: v1(20.5,25.07) 20.98,25.55 U8.3 ; R30.2 28.36,20.24 28.36,21.01 v1(28.04,21.34)
  BOTTOM w0.152: v1(20.5,25.07) 20.86,24.71 21.01,24.71 21.31,24.41 21.31,20.9 22.38,19.84 22.39,19.78 22.4,19.76 22.55,19.6 22.58,19.59 22.63,19.58 22.68,19.53 27.14,19.53 27.21,19.59 27.21,19.59 27.23,19.6 27.39,19.76 27.4,19.78 27.4,19.78 27.46,19.85 27.46,20.75 v1(28.04,21.34)
N37631: length 7.4
  TOP w0.152: U8.5 20.86,24.25 20.85,24.23 20.07,24.23 19.42,23.59 19.42,22.24 R31.2 ; U8.5 22.89,24.25 ; U8.5 22.28,23.99 22.94,23.99 23.08,23.86
N38550: length 17.7
  TOP w0.152: v1(44.45,28.19) 45.89,28.19 46.06,28.36 R32.2 ; U9.7 38.53,22.53 v1(38.35,22.35)
  BOTTOM w0.152: v1(38.35,22.35) 38.35,29.42 38.36,29.46 39.4,30.5 39.44,30.51 43.4,30.51 43.72,30.19 43.72,30.19 43.9,30.01 43.91,30 43.92,29.95 44.45,29.42 v1(44.45,28.19)
N38650: length 4.1
  TOP w0.152: Y9.2 36.3,25.63 36.3,24.69 36.45,24.54 37.23,24.54 37.59,24.9 U9.4
N38718: length 1.7
  TOP w0.152: U9.6 37.5,23.6 37.48,23.62 Y9.1
N38942: length 4.5
  TOP w0.152: U9.2 37.66,26.2 37.48,26.38 37.48,27.57 37.93,28.02 37.93,29.55 R34.2
N38966: length 16.2
  TOP w0.152: U9.3 37.49,25.55 v1(37.01,25.07) ; v1(44.55,21.34) 44.87,21.01 44.87,20.24 R35.2
  BOTTOM w0.152: v1(44.55,21.34) 43.97,20.75 43.97,19.85 43.91,19.78 43.91,19.78 43.9,19.76 43.74,19.6 43.72,19.59 43.72,19.59 43.65,19.53 39.19,19.53 39.14,19.58 39.09,19.59 39.06,19.6 38.91,19.76 38.9,19.78 38.89,19.84 37.82,20.9 37.82,24.41 37.52,24.71 37.37,24.71 v1(37.01,25.07)
N38978: length 7.4
  TOP w0.152: U9.5 38.79,23.99 39.45,23.99 39.59,23.86 ; U9.5 39.4,24.25 ; U9.5 37.37,24.25 37.36,24.23 36.58,24.23 35.93,23.59 35.93,22.24 R36.2
N41247: length 2.8
  TOP w0.152: Y10.2 12.06,42.72 12.65,43.31 U10.3
N41251: length 2.4
  TOP w0.152: Y10.1 13.72,43.14 13.72,43.38 13.69,43.42 13.69,44.04 14.1,44.45 U10.5
N41409: length 6
  TOP w0.152: J10.2 13.06,48.82 13.31,48.56 13.31,48.29 13.26,48.23 U10.9 14.24,47.57 14.79,47.03 14.79,46.5 15.34,45.95 R37.1 C31.2
N41421: length 1.6
  TOP w0.152: J10.3 12.6,47.88 U10.10
N42285: length 2.8
  TOP w0.152: Y11.2 3.96,42.72 4.55,43.31 U11.3
N42289: length 2.4
  TOP w0.152: U11.5 5.99,44.45 5.59,44.04 5.59,43.42 5.62,43.38 5.62,43.14 Y11.1
N42447: length 6
  TOP w0.152: J11.2 4.95,48.82 5.21,48.56 5.21,48.29 5.16,48.23 U11.9 6.14,47.57 6.69,47.03 6.69,46.5 7.24,45.95 R38.1 C35.2
N42459: length 1.6
  TOP w0.152: J11.3 4.5,47.88 U11.10
N43363: length 2.8
  TOP w0.152: Y12.2 27.99,34.37 28.57,34.95 U12.3
N43367: length 2.4
  TOP w0.152: Y12.1 29.65,34.78 29.65,35.03 29.62,35.06 29.62,35.69 30.02,36.09 U12.5
N43525: length 6
  TOP w0.152: C39.2 R39.1 31.27,37.59 30.72,38.14 30.72,38.67 30.17,39.22 U12.9 29.18,39.88 29.24,39.93 29.24,40.21 28.98,40.46 J12.2
N43537: length 1.6
  TOP w0.152: U12.10 28.52,39.52 J12.3
N44477: length 2.8
  TOP w0.152: Y13.2 20.07,34.32 20.65,34.9 U13.3
N44481: length 2.4
  TOP w0.152: Y13.1 21.72,34.73 21.72,34.98 21.69,35.01 21.69,35.64 22.1,36.04 U13.5
N44639: length 6
  TOP w0.152: J13.2 21.06,40.41 21.31,40.16 21.31,39.88 21.26,39.83 U13.9 22.24,39.17 22.79,38.62 22.79,38.09 23.34,37.54 R40.1 C43.2
N44651: length 1.6
  TOP w0.152: J13.3 20.6,39.47 U13.10
N45641: length 2.8
  TOP w0.152: U14.3 12.62,34.98 12.04,34.39 Y14.2
N45645: length 2.4
  TOP w0.152: Y14.1 13.7,34.8 13.7,35.05 13.67,35.08 13.67,35.71 14.07,36.12 U14.5
N45803: length 6
  TOP w0.152: J14.2 13.03,40.49 13.28,40.23 13.28,39.95 13.23,39.9 13.23,39.24 14.22,39.24 14.77,38.69 14.77,38.17 15.32,37.62 R41.1 C47.2
N45815: length 1.6
  TOP w0.152: 12.57,39.24 12.57,39.55 J14.3
N188740: length 1.5
  TOP w0.152: R1.1 2.76,12.74 D1.2
N188900: length 1.5
  TOP w0.152: D2.2 14,4.02 R2.1
N189060: length 1.5
  TOP w0.152: R3.1 4.02,2.76 D3.2
N192720: length 1.5
  TOP w0.152: 11.82,13.07 R4.1 12,13.07 D4.2
N256650: length 1.5
  TOP w0.152: R6.1 2.76,29.25 D5.2
N256810: length 1.5
  TOP w0.152: D6.2 14,20.53 R7.1
N256970: length 1.5
  TOP w0.152: R8.1 4.02,19.27 D7.2
N258810: length 1.5
  TOP w0.152: D8.2 12,29.58 R9.1
N299270: length 1.5
  TOP w0.152: D9.2 19.27,12.74 R11.1
N299430: length 1.5
  TOP w0.152: R12.1 30.51,4.02 D10.2
N299590: length 1.5
  TOP w0.152: D11.2 20.53,2.76 R13.1
N301350: length 1.5
  TOP w0.152: D12.2 28.51,13.07 R14.1
N310551: length 1.5
  TOP w0.152: R16.1 45.02,13.07 D16.2
N313670: length 1.5
  TOP w0.152: R18.1 35.78,12.74 D13.2
N313830: length 1.5
  TOP w0.152: D14.2 47.02,4.02 R19.1
N314070: length 1.5
  TOP w0.152: R20.1 37.04,2.76 D15.2
N358421: length 1.5
  TOP w0.152: R22.1 45.02,46.09 D20.2
N361540: length 1.5
  TOP w0.152: D17.2 35.78,45.76 R24.1
N361700: length 1.5
  TOP w0.152: R25.1 47.02,37.04 D18.2
N361940: length 1.5
  TOP w0.152: R26.1 37.04,35.78 D19.2
N371911: length 1.5
  TOP w0.152: R27.1 28.51,29.58 D24.2
N375030: length 1.5
  TOP w0.152: R29.1 19.27,29.25 D21.2
N375190: length 1.5
  TOP w0.152: R30.1 30.51,20.53 D22.2
N375430: length 1.5
  TOP w0.152: R31.1 20.53,19.27 D23.2
N385381: length 1.5
  TOP w0.152: D28.2 45.02,29.58 R32.1
N388500: length 1.5
  TOP w0.152: D25.2 35.78,29.25 R34.1
N388660: length 1.5
  TOP w0.152: D26.2 47.02,20.53 R35.1
N388900: length 1.5
  TOP w0.152: R36.1 37.04,19.27 D27.2

## Copper pours and planes (outline as drawn; the poured copper is in the pictures)
VCC_BAT on TOP (solid shape): 2.67,21.72 0.4,21.72 0.4,28.07 2.67,28.07
VCC_BAT on TOP (solid shape): 2.67,5.21 0.41,5.21 0.41,11.56 2.67,11.56
VCC_BAT on TOP (solid shape): 16.64,21.72 14.1,21.72 14.1,28.07 16.64,28.07
VCC_BAT on TOP (solid shape): 16.64,5.21 14.1,5.21 14.1,11.56 16.64,11.56
VCC_BAT on TOP (solid shape): 19.18,21.72 16.64,21.72 16.64,28.07 19.18,28.07
VCC_BAT on TOP (solid shape): 19.18,5.21 16.64,5.21 16.64,11.56 19.18,11.56
VCC_BAT on TOP (solid shape): 33.15,21.72 30.61,21.72 30.61,28.07 33.15,28.07
VCC_BAT on TOP (solid shape): 33.15,5.21 30.61,5.21 30.61,11.56 33.15,11.56
VCC_BAT on TOP (solid shape): 35.69,38.23 33.15,38.23 33.15,44.58 35.69,44.58
VCC_BAT on TOP (solid shape): 35.69,21.72 33.15,21.72 33.15,28.07 35.69,28.07
VCC_BAT on TOP (solid shape): 35.69,5.21 33.15,5.21 33.15,11.56 35.69,11.56
VCC_BAT on TOP (solid shape): 49.39,38.23 47.12,38.23 47.12,44.58 49.39,44.58
VCC_BAT on TOP (solid shape): 49.4,21.72 47.12,21.72 47.12,28.07 49.4,28.07
VCC_BAT on TOP (solid shape): 49.43,5.21 47.12,5.21 47.12,11.56 49.43,11.56
VCC_BAT on TOP (solid shape): 10.97,19.16 11.51,19.16 11.56,19.12 11.56,16.64 5.21,16.64 5.21,19.18 10.95,19.18
VCC_BAT on TOP (solid shape): 10.97,2.65 11.51,2.65 11.56,2.61 11.56,0.4 5.21,0.4 5.21,2.67 10.95,2.67
VCC_BAT on TOP (solid shape): 11.56,30.61 5.81,30.61 5.79,30.63 5.25,30.63 5.21,30.67 5.21,33.15 11.56,33.15
VCC_BAT on TOP (solid shape): 11.56,14.1 5.81,14.1 5.79,14.12 5.25,14.12 5.21,14.16 5.21,16.64 11.56,16.64
VCC_BAT on TOP (solid shape): 27.48,19.16 28.02,19.16 28.07,19.12 28.07,16.64 21.72,16.64 21.72,19.18 27.46,19.18
VCC_BAT on TOP (solid shape): 27.48,2.65 28.02,2.65 28.07,2.61 28.07,0.36 21.72,0.36 21.72,2.67 27.46,2.67
VCC_BAT on TOP (solid shape): 28.07,30.61 22.32,30.61 22.3,30.63 21.76,30.63 21.72,30.67 21.72,33.15 28.07,33.15
VCC_BAT on TOP (solid shape): 28.07,14.1 22.32,14.1 22.3,14.12 21.76,14.12 21.72,14.16 21.72,16.64 28.07,16.64
VCC_BAT on TOP (solid shape): 43.99,35.67 44.53,35.67 44.58,35.63 44.58,33.15 38.23,33.15 38.23,35.69 43.97,35.69
VCC_BAT on TOP (solid shape): 43.99,19.16 44.53,19.16 44.58,19.12 44.58,16.64 38.23,16.64 38.23,19.18 43.97,19.18
VCC_BAT on TOP (solid shape): 43.99,2.65 44.53,2.65 44.58,2.61 44.58,0.38 38.23,0.38 38.23,2.67 43.97,2.67
VCC_BAT on TOP (solid shape): 44.58,47.12 38.83,47.12 38.81,47.14 38.27,47.14 38.23,47.18 38.23,49.37 44.58,49.37
VCC_BAT on TOP (solid shape): 44.58,30.61 38.83,30.61 38.81,30.63 38.27,30.63 38.23,30.67 38.23,33.15 44.58,33.15
VCC_BAT on TOP (solid shape): 44.58,14.1 38.83,14.1 38.81,14.12 38.27,14.12 38.23,14.16 38.23,16.64 44.58,16.64
VCC_BAT on BOTTOM (solid shape): 7.72,37.06 5.69,37.06 5.69,39.73 7.72,39.73
VCC_BAT on BOTTOM (solid shape): 7.75,45.39 5.71,45.39 5.71,48.06 7.75,48.06
VCC_BAT on BOTTOM (solid shape): 15.82,37.06 13.79,37.06 13.79,39.73 15.82,39.73
VCC_BAT on BOTTOM (solid shape): 15.85,45.39 13.82,45.39 13.82,48.06 15.85,48.06
VCC_BAT on BOTTOM (solid shape): 23.85,36.98 21.82,36.98 21.82,39.65 23.85,39.65
VCC_BAT on BOTTOM (solid shape): 31.78,37.03 29.74,37.03 29.74,39.7 31.78,39.7
VCC_BAT on BOTTOM (solid shape): outline of 384 points within 0.43,16.94 16.33,32.84
VCC_BAT on BOTTOM (solid shape): outline of 384 points within 0.43,0.43 16.33,16.33
VCC_BAT on BOTTOM (solid shape): outline of 384 points within 16.94,16.94 32.84,32.84
VCC_BAT on BOTTOM (solid shape): outline of 384 points within 16.94,0.43 32.84,16.33
VCC_BAT on BOTTOM (solid shape): outline of 384 points within 33.45,33.45 49.35,49.35
VCC_BAT on BOTTOM (solid shape): outline of 384 points within 33.45,16.94 49.35,32.84
VCC_BAT on BOTTOM (solid shape): outline of 384 points within 33.45,0.43 49.35,16.33
(no net) on TOP: 21.72,33.15 21.72,30.61 28.07,30.61 28.07,33.15
(no net) on TOP: 5.21,33.15 5.21,30.61 11.56,30.61 11.56,33.15
(no net) on TOP: 47.12,11.56 47.12,5.21 49.43,5.21 49.43,11.56
(no net) on TOP: 14.1,28.07 14.1,21.72 16.64,21.72 16.64,28.07
(no net) on TOP: 33.15,28.07 33.15,21.72 35.69,21.72 35.69,28.07
(no net) on TOP: 5.21,16.64 5.21,14.1 11.56,14.1 11.56,16.64
(no net) on TOP: 14.1,11.56 14.1,5.21 16.64,5.21 16.64,11.56
(no net) on TOP: 47.12,28.07 47.12,21.72 49.4,21.72 49.4,28.07
(no net) on TOP: 5.21,19.18 5.21,16.64 11.56,16.64 11.56,19.18
(no net) on TOP: 30.61,28.07 30.61,21.72 33.15,21.72 33.15,28.07
(no net) on TOP: 21.72,19.18 21.72,16.64 28.07,16.64 28.07,19.18
(no net) on TOP: 38.23,49.37 38.23,47.12 44.58,47.12 44.58,49.37
(no net) on TOP: 33.15,44.58 33.15,38.23 35.69,38.23 35.69,44.58
(no net) on TOP: 0.4,28.07 0.4,21.72 2.67,21.72 2.67,28.07
(no net) on TOP: 21.72,2.67 21.72,0.36 28.07,0.36 28.07,2.67
(no net) on TOP: 38.23,33.15 38.23,30.61 44.58,30.61 44.58,33.15
(no net) on TOP: 21.72,16.64 21.72,14.1 28.07,14.1 28.07,16.64
(no net) on TOP: 5.21,2.67 5.21,0.4 11.56,0.4 11.56,2.67
(no net) on TOP: 38.23,16.64 38.23,14.1 44.58,14.1 44.58,16.64
(no net) on TOP: 30.61,11.56 30.61,5.21 33.15,5.21 33.15,11.56
(no net) on TOP: 47.12,44.58 47.12,38.23 49.39,38.23 49.39,44.58
(no net) on TOP: 33.15,11.56 33.15,5.21 35.69,5.21 35.69,11.56
(no net) on TOP: 38.23,2.67 38.23,0.38 44.58,0.38 44.58,2.67
(no net) on TOP: 16.64,28.07 16.64,21.72 19.18,21.72 19.18,28.07
(no net) on TOP: 16.64,11.56 16.64,5.21 19.18,5.21 19.18,11.56
(no net) on TOP: 38.23,19.18 38.23,16.64 44.58,16.64 44.58,19.18
(no net) on TOP: 38.23,35.69 38.23,33.15 44.58,33.15 44.58,35.69
(no net) on TOP: 0.41,11.56 0.41,5.21 2.67,5.21 2.67,11.56
(no net) on BOTTOM: 33.45,24.89 49.35,24.89 ; 1 cut-out
(no net) on BOTTOM: 39.12,3.3 39.12,13.46 43.69,13.46 43.69,3.3
(no net) on BOTTOM: 5.69,36.68 5.69,33.76 7.72,33.76 7.72,36.68
(no net) on BOTTOM: 5.71,45.01 5.71,42.09 7.75,42.09 7.75,45.01
(no net) on BOTTOM: 16.94,8.38 32.84,8.38 ; 1 cut-out
(no net) on BOTTOM: 21.82,39.65 21.82,36.98 23.85,36.98 23.85,39.65
(no net) on BOTTOM: 6.1,19.81 6.1,29.97 10.67,29.97 10.67,19.81
(no net) on BOTTOM: 0.43,24.89 16.33,24.89 ; 1 cut-out
(no net) on BOTTOM: 29.74,39.7 29.74,37.03 31.78,37.03 31.78,39.7
(no net) on BOTTOM: 22.61,19.81 22.61,29.97 27.18,29.97 27.18,19.81
(no net) on BOTTOM: 13.82,45.01 13.82,42.09 15.85,42.09 15.85,45.01
(no net) on BOTTOM: 5.71,48.06 5.71,45.39 7.75,45.39 7.75,48.06
(no net) on BOTTOM: 29.74,36.65 29.74,33.73 31.78,33.73 31.78,36.65
(no net) on BOTTOM: 6.1,3.3 6.1,13.46 10.67,13.46 10.67,3.3
(no net) on BOTTOM: 0.43,8.38 16.33,8.38 ; 1 cut-out
(no net) on BOTTOM: 22.61,3.3 22.61,13.46 27.18,13.46 27.18,3.3
(no net) on BOTTOM: 13.82,48.06 13.82,45.39 15.85,45.39 15.85,48.06
(no net) on BOTTOM: 33.45,8.38 49.35,8.38 ; 1 cut-out
(no net) on BOTTOM: 39.12,36.32 39.12,46.48 43.69,46.48 43.69,36.32
(no net) on BOTTOM: 39.12,19.81 39.12,29.97 43.69,29.97 43.69,19.81
(no net) on BOTTOM: 13.79,36.68 13.79,33.76 15.82,33.76 15.82,36.68
(no net) on BOTTOM: 21.82,36.6 21.82,33.68 23.85,33.68 23.85,36.6
(no net) on BOTTOM: 13.79,39.73 13.79,37.06 15.82,37.06 15.82,39.73
(no net) on BOTTOM: 16.94,24.89 32.84,24.89 ; 1 cut-out
(no net) on BOTTOM: 33.45,41.4 49.35,41.4 ; 1 cut-out
(no net) on BOTTOM: 5.69,39.73 5.69,37.06 7.72,37.06 7.72,39.73
0 on BOTTOM (solid shape): 10.67,29.9 10.67,19.87 10.61,19.81 6.16,19.81 6.1,19.87 6.1,29.89 6.18,29.97 10.6,29.97
0 on BOTTOM (solid shape): 10.67,13.39 10.67,3.36 10.61,3.3 6.16,3.3 6.1,3.36 6.1,13.38 6.18,13.46 10.6,13.46
0 on BOTTOM (solid shape): 27.18,29.9 27.18,19.87 27.12,19.81 22.67,19.81 22.61,19.87 22.61,29.89 22.69,29.97 27.11,29.97
0 on BOTTOM (solid shape): 27.18,13.39 27.18,3.36 27.12,3.3 22.67,3.3 22.61,3.36 22.61,13.38 22.69,13.46 27.11,13.46
0 on BOTTOM (solid shape): 43.69,46.41 43.69,36.38 43.63,36.32 39.18,36.32 39.12,36.38 39.12,46.4 39.2,46.48 43.62,46.48
0 on BOTTOM (solid shape): 43.69,29.9 43.69,19.87 43.63,19.81 39.18,19.81 39.12,19.87 39.12,29.89 39.2,29.97 43.62,29.97
0 on BOTTOM (solid shape): 43.69,13.39 43.69,3.36 43.63,3.3 39.18,3.3 39.12,3.36 39.12,13.38 39.2,13.46 43.62,13.46
0 on BOTTOM (solid shape): 7.72,33.76 5.69,33.76 5.69,34.23 5.69,34.23 5.72,34.39 5.69,34.55 5.69,34.56 5.69,36.68 7.72,36.68
0 on BOTTOM (solid shape): 7.75,42.09 5.71,42.09 5.71,42.56 5.72,42.57 5.74,42.72 5.72,42.88 5.71,42.89 5.71,45.01 7.75,45.01
0 on BOTTOM (solid shape): 15.82,33.76 13.79,33.76 13.79,34.23 13.79,34.23 13.82,34.39 13.79,34.55 13.79,34.56 13.79,36.68 15.82,36.68
0 on BOTTOM (solid shape): 15.85,42.09 13.82,42.09 13.82,42.56 13.82,42.57 13.84,42.72 13.82,42.88 13.82,42.89 13.82,45.01 15.85,45.01
0 on BOTTOM (solid shape): 23.85,33.68 21.82,33.68 21.82,34.15 21.82,34.16 21.84,34.32 21.82,34.47 21.82,34.48 21.82,36.6 23.85,36.6
0 on BOTTOM (solid shape): 31.78,33.73 29.74,33.73 29.74,34.2 29.75,34.21 29.77,34.37 29.75,34.52 29.74,34.53 29.74,36.65 31.78,36.65
